# Altium PCB 驱动.pcbdoc (part 1 of 2)
Units mil, origin at the board's own origin, x right, y up, seen from the top; angles counter-clockwise.
Board outline 18731.41 x 3255.76 mil, 2 copper layers (Top Layer, Bottom Layer); 107 components, 212 nets, 609 pads, 80 vias.
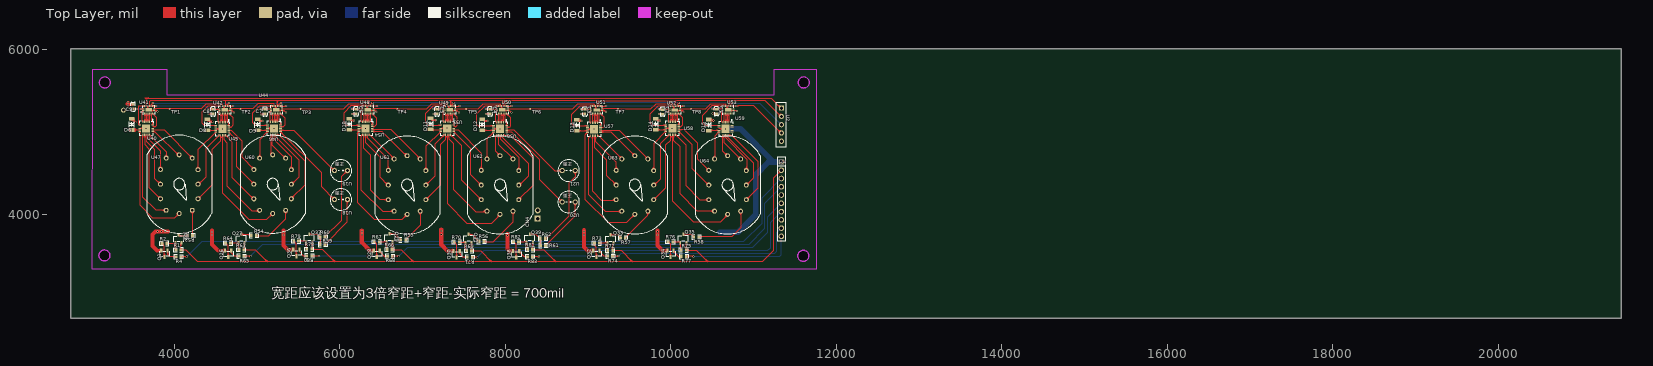
[diagram p0: Top Layer view]
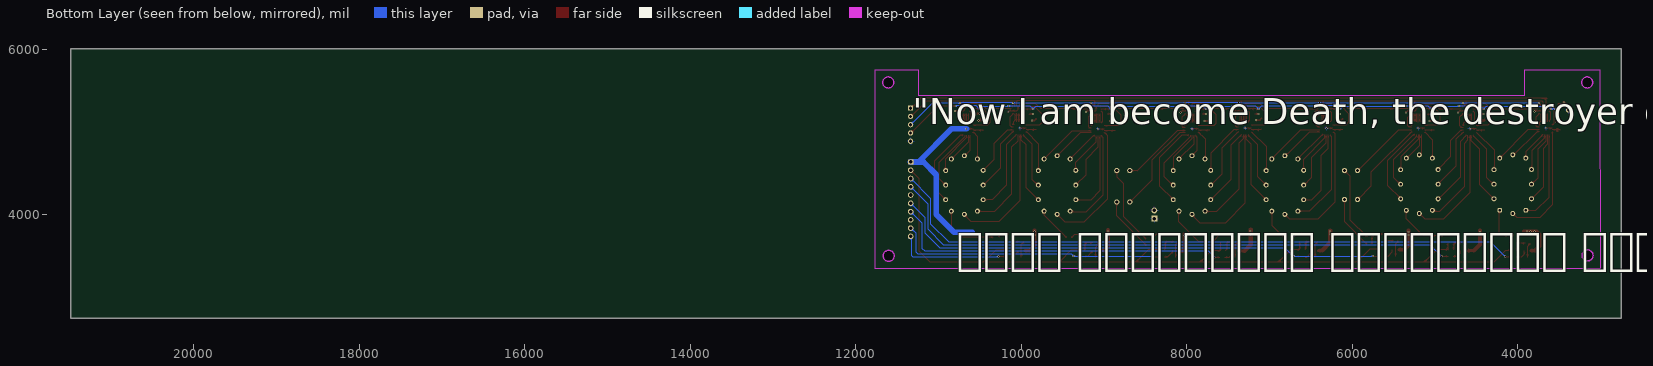
[diagram p1: Bottom Layer view, seen from below]

## Layer stack, top to bottom
Top Layer: signal copper (thickness not stored)
Dielectric: dielectric 12.6, FR-4, Dk 4.8
Bottom Layer: signal copper (thickness not stored)

## Board outline
21481.41,2750 2750,2750 2750,6005.76 21481.41,6005.76
cut-out: 3227.08,5600 cw(c3160.15,5600) 3093.22,5600 cw(c3160.15,5600)
cut-out: 3222.08,3510 cw(c3155.15,3510) 3088.22,3510 cw(c3155.15,3510)
cut-out: 11667.08,3505 cw(c11600.15,3505) 11533.22,3505 cw(c11600.15,3505)
cut-out: 11672.08,5600 cw(c11605.15,5600) 11538.22,5600 cw(c11605.15,5600)

## Design rules (kind name [scope] priority, off if disabled: settings)
BoardOutlineClearance copperThickness1oz [All] p0: genericclearance=10 ignorepadtopadclearanceinfootprint=FALSE except(0: Arc-SplitContinuation Track-SplitContinuation SMDPad-SplitContinuation THPad-SplitContinuation Via-SplitContinuation Fill-SplitContinuation Poly-SplitContinuation Region-SplitContinuation Text-SplitContinuation; 6: SMDPad-CutoutEdge THPad-CutoutEdge Via-CutoutEdge Fill-CutoutEdge Region-CutoutEdge; 11.8: Track-OutlineEdge SMDPad-OutlineEdge THPad-OutlineEdge Via-OutlineEdge Fill-OutlineEdge Region-OutlineEdge Poly-OutlineEdge Text-OutlineEdge Track-CutoutEdge)
BoardOutlineClearance copperThickness2oz [All] p0: genericclearance=10 ignorepadtopadclearanceinfootprint=FALSE except(0: Arc-SplitContinuation Track-SplitContinuation SMDPad-SplitContinuation THPad-SplitContinuation Via-SplitContinuation Fill-SplitContinuation Poly-SplitContinuation Region-SplitContinuation Text-SplitContinuation; 6: SMDPad-CutoutEdge THPad-CutoutEdge Via-CutoutEdge Fill-CutoutEdge Region-CutoutEdge; 11.8: Track-OutlineEdge SMDPad-OutlineEdge THPad-OutlineEdge Via-OutlineEdge Fill-OutlineEdge Region-OutlineEdge Poly-OutlineEdge Text-OutlineEdge Track-CutoutEdge)
Clearance copperThickness1oz [(InNet('SWITCH1') OR InNet('SWITCH2') OR InNet('+5V') OR InNet('SWITCH3') OR InNet('SWITCH6') OR InNet('SWITCH4') OR InNet('A2') OR InNet('A3') OR InNet('A4') OR InNet('A5') OR InNet('A6') OR InNet('A7') OR InNet('GND') OR InNet('CLK') OR InNet('CS') OR InNet('MOSI') OR InNet('ADOT') OR InNet('A1') OR InNet('NIX_A7') OR InNet('NIX_A6') OR InNet('170V') OR InNet('SWITCH5') OR InNet('NIX_D1') OR InNet('D_HV') OR InNet('NIX_G1') OR InNet('F7') OR InNet('F8') OR InNet('F9') OR InNet('F0') OR InNet('F5') OR InNet('F6') OR InNet('E0') OR InNet('FDOT') OR InNet('F1') OR InNet('F2') OR InNet('F3') OR InNet('F4') OR InNet('E8') OR InNet('E9') OR InNet('C2') OR InNet('C3') OR InNet('C4') OR InNet('C5') OR InNet('C6') OR InNet('C7') OR InNet('CDOT') OR InNet('C1') OR InNet('NIX_A0') OR InNet('NIX_B1') OR InNet('NIX_B2') OR InNet('NIX_B3') OR InNet('NIX_B4') OR InNet('NIX_B5') OR InNet('NIX_B7') OR InNet('NIX_B8') OR InNet('NIX_B9') OR InNet('NIX_B0') OR InNet('NIX_ADOT') OR InNet('NIX_A4') OR InNet('NIX_A2') OR InNet('NIX_A3') OR InNet('NIX_A1') OR InNet('NIX_A5') OR InNet('A_HV') OR InNet('NIX_A8') OR InNet('NIX_A9') OR InNet('C_HV') OR InNet('A8') OR InNet('C8') OR InNet('D5') OR InNet('EDOT') OR InNet('NIX_BDOT') OR InNet('NIX_E8') OR InNet('NIX_E0') OR InNet('NIX_E9') OR InNet('NIX_G0') OR InNet('E_HV') OR InNet('NIX_H0') OR InNet('F_HV') OR InNet('NIX_F4') OR InNet('NIX_F2') OR InNet('NIX_F3') OR InNet('NIX_F1') OR InNet('NIX_F5') OR InNet('NIX_FDOT') OR InNet('NIX_F6') OR InNet('NIX_F7') OR InNet('NIX_F0') OR InNet('NIX_F8') OR InNet('NIX_F9') OR InNet('C0') OR InNet('DDOT') OR InNet('D1') OR InNet('D2') OR InNet('D3') OR InNet('D4') OR InNet('C9') OR InNet('D7') OR InNet('D8') OR InNet('D9') OR InNet('D0') OR InNet('H0') OR InNet('H1') OR InNet('D6') OR InNet('E2') OR InNet('E3') OR InNet('E4') OR InNet('E5') OR InNet('E6') OR InNet('E7') OR InNet('E1') OR InNet('NIX_D4') OR InNet('NIX_D2') OR InNet('NIX_D3') OR InNet('NIX_D5') OR InNet('NIX_DDOT') OR InNet('NIX_D6') OR InNet('NIX_D7') OR InNet('NIX_D0') OR InNet('NIX_D8') OR InNet('NIX_D9') OR InNet('NIX_E4') OR InNet('NIX_E2') OR InNet('NIX_E3') OR InNet('NIX_E1') OR InNet('NIX_E5') OR InNet('NIX_EDOT') OR InNet('NIX_E6') OR InNet('NIX_E7') OR InNet('NIX_H1') OR InNet('B_HV') OR InNet('B4') OR InNet('G1') OR InNet('NIX_B6') OR InNet('NIX_CDOT') OR InNet('NIX_C4') OR InNet('NIX_C1') OR InNet('NIX_C3') OR InNet('NIX_C2') OR InNet('NIX_C5') OR InNet('NIX_C6') OR InNet('NIX_C7') OR InNet('NIX_C0') OR InNet('NIX_C8') OR InNet('NIX_C9') OR InNet('B0') OR InNet('B9') OR InNet('B8') OR InNet('B7') OR InNet('B6') OR InNet('B5') OR InNet('G0') OR InNet('B2') OR InNet('B1') OR InNet('BDOT') OR InNet('A0') OR InNet('A9') OR InNet('B3') OR InNet('$1N13403') OR InNet('$1N13394') OR InNet('$1N13396') OR InNet('$1N13978') OR InNet('$1N13404') OR InNet('$1N13405') OR InNet('$1N13979') OR InNet('$1N13980') OR InNet('$1N13981') OR InNet('$1N13982') OR InNet('$1N13983') OR InNet('$1N13668') OR InNet('$1N13669') OR InNet('$1N13670') OR InNet('$1N13767') OR InNet('$1N13768') OR InNet('$1N13769') OR InNet('G_HV1') OR InNet('G_HV2') OR InNet('H_HV1') OR InNet('H_HV2') OR InNet('$1N27498') OR InNet('$1N28072') OR InNet('$1N28104') OR InNet('$1N28136') OR InNet('$1N29050') OR InNet('$1N29111') OR InNet('$1N27497') OR InNet('$1N27501') OR InNet('$1N28168') OR InNet('$1N27677') OR InNet('$1N27676') OR InNet('$1N27680') OR InNet('$1N27856') OR InNet('$1N27855') OR InNet('$1N27859') OR InNet('$1N28035') OR InNet('$1N28034') OR InNet('$1N28038') OR InNet('$1N28943') OR InNet('$1N28942') OR InNet('$1N28946') OR InNet('$1N28989') OR InNet('$1N28951') OR InNet('$1N28950') OR InNet('$1N28954') OR InNet('$1N28974') OR InNet('$1N28959') OR InNet('$1N28958') OR InNet('$1N28962') OR InNet('$1N28967') OR InNet('$1N28966') OR InNet('$1N28970') OR InNet('PGND'))] p1: gap=7 ignorepadtopadclearanceinfootprint=FALSE except(4: Track-Track; 6: Track-SMDPad SMDPad-SMDPad Track-THPad SMDPad-THPad THPad-THPad Track-Via SMDPad-Via THPad-Via Via-Via Track-Fill SMDPad-Fill THPad-Fill Via-Fill Fill-Fill SMDPad-Region THPad-Region Via-Region Fill-Region Region-Region Track-Poly SMDPad-Poly THPad-Poly Via-Poly Fill-Poly Poly-Poly Track-Text SMDPad-Text THPad-Text Via-Text Fill-Text Region-Text Poly-Text Text-Text Track-Hole SMDPad-Hole THPad-Hole Via-Hole Fill-Hole Region-Hole Poly-Hole Text-Hole; 11.8: Track-Region Region-Poly Track-Sheet SMDPad-Sheet THPad-Sheet Via-Sheet Fill-Sheet Region-Sheet Poly-Sheet Text-Sheet Sheet-Hole)
Clearance copperThickness2oz [All] p1: gap=7 ignorepadtopadclearanceinfootprint=FALSE except(6: Track-SMDPad SMDPad-SMDPad Track-THPad SMDPad-THPad THPad-THPad Track-Via SMDPad-Via THPad-Via Via-Via Track-Fill SMDPad-Fill THPad-Fill Via-Fill Fill-Fill SMDPad-Region THPad-Region Via-Region Fill-Region Region-Region Track-Poly SMDPad-Poly THPad-Poly Via-Poly Fill-Poly Poly-Poly Track-Text SMDPad-Text THPad-Text Via-Text Fill-Text Region-Text Poly-Text Text-Text Track-Hole SMDPad-Hole THPad-Hole Via-Hole Fill-Hole Region-Hole Poly-Hole Text-Hole; 8: Track-Track; 11.8: Track-Region Region-Poly Track-Sheet SMDPad-Sheet THPad-Sheet Via-Sheet Fill-Sheet Region-Sheet Poly-Sheet Text-Sheet Sheet-Hole)
DiffPairsRouting differentialPair [All] p1: maxuncoupledlength=10 minlimit=6 maxlimit=6 mostfreqgap=6 toplayer_minwidth=5 toplayer_prefwidth=10 toplayer_maxwidth=100 bottomlayer_minwidth=5 bottomlayer_prefwidth=10 bottomlayer_maxwidth=100
PasteMaskExpansion pasteMaskExpansion [All] p1: expansion=0
PlaneConnect innerPlane [All] p1: planeconnectstyle=Relief reliefexpansion=20 reliefentries=4 reliefconductorwidth=10 reliefairgap=10
PolygonConnect copperRegion [All] p1: connectstyle=Relief reliefentries=4 reliefconductorwidth=10 polygonreliefangle="90 Angle" airgapwidth=10
RoutingVias viaSize [All] p1: viastyle="Through Hole" holewidth=12.0078 minholewidth=11.811 maxholewidth=248.0314 width=24.0158 minwidth=19.685 maxwidth=393.7008
SolderMaskExpansion solderMaskExpansion [All] p1: useseparateexpansions=TRUE expansion=2 expansionbottom=2
Width copperThickness1oz [All] p1: maxlimit=100 minlimit=5 preferedwidth=10
Width copperThickness2oz [All] p1: maxlimit=100 minlimit=8 preferedwidth=10

## Components (designator, comment, footprint, x,y, rotation, side; value= is the part's Value field where it differs from the comment)
C1 "CAP_0603" C0603 10550.22,5250.97 r270 top
C2 "CAP_0603" C0603 9900,5245.2 r270 top
C3 "CAP_0603" C0603 8959.25,5248.31 r270 top
C4 "CAP_0603" C0603 7812.28,5248.63 r270 top
C5 "CAP_0603" C0603 7175,5248.63 r270 top
C6 "CAP_0603" C0603 6195,5249.57 r270 top
C7 "CAP_0603" C0603 5093.22,5247.52 r270 top
C8 "CAP_0603" C0603 4468.27,5248.72 r270 top
C9 "CAP_0603" C0603 3500.75,5307.64 r90 top
CN4 "ZX-XH2.54-2PZZ" CONN-TH_2P-P2.50_HX25003-2A 8390.15,4005 r90 top
D6 "ZMM51" LL-34_L3.5-W1.5-RD 3485,5092.87 r90 top
D8 "ZMM51" LL-34_L3.5-W1.5-RD 4400,5090.63 r90 top
D9 "ZMM51" LL-34_L3.5-W1.5-RD 5005,5090.63 r90 top
D10 "ZMM51" LL-34_L3.5-W1.5-RD 6111.42,5095.63 r90 top
D11 "ZMM51" LL-34_L3.5-W1.5-RD 7095,5100.63 r90 top
D12 "ZMM51" LL-34_L3.5-W1.5-RD 7720,5090.63 r90 top
D13 "ZMM51" LL-34_L3.5-W1.5-RD 8865,5083.76 r90 top
D14 "ZMM51" LL-34_L3.5-W1.5-RD 9815,5095.63 r90 top
D15 "ZMM51" LL-34_L3.5-W1.5-RD 10455,5085.63 r90 top
H4 "MH254V-11-10-1196" HDR-TH_10P-P2.54-V-M 11335.15,4190 r270 top
Q1 "MMBT5551_C2145" SOT-23-3_L2.9-W1.3-P1.90-LS2.4-BR 3880.15,3530 r90 top
Q2 "MMBTA92LT1G" SOT-23-3_L2.9-W1.6-P1.90-LS2.8-BR 4050.15,3710 r270 top
Q26 "MMBT5551_C2145" SOT-23-3_L2.9-W1.3-P1.90-LS2.4-BR 4650.15,3530 r90 top
Q27 "MMBTA92LT1G" SOT-23-3_L2.9-W1.6-P1.90-LS2.8-BR 4810.15,3715 r270 top
Q28 "MMBT5551_C2145" SOT-23-3_L2.9-W1.3-P1.90-LS2.4-BR 6445.15,3530 r90 top
Q29 "MMBTA92LT1G" SOT-23-3_L2.9-W1.6-P1.90-LS2.8-BR 6600.15,3725 r270 top
Q30 "MMBT5551_C2145" SOT-23-3_L2.9-W1.3-P1.90-LS2.4-BR 7410.15,3525 r90 top
Q31 "MMBTA92LT1G" SOT-23-3_L2.9-W1.6-P1.90-LS2.8-BR 7555.15,3715 r270 top
Q32 "MMBT5551_C2145" SOT-23-3_L2.9-W1.3-P1.90-LS2.4-BR 9100.15,3530 r90 top
Q33 "MMBTA92LT1G" SOT-23-3_L2.9-W1.6-P1.90-LS2.8-BR 9270.15,3710 r270 top
Q34 "MMBT5551_C2145" SOT-23-3_L2.9-W1.3-P1.90-LS2.4-BR 9995.15,3530 r90 top
Q35 "MMBTA92LT1G" SOT-23-3_L2.9-W1.6-P1.90-LS2.8-BR 10150.15,3715 r270 top
Q36 "MMBT5551_C2145" SOT-23-3_L2.9-W1.3-P1.90-LS2.4-BR 5475.15,3540 r90 top
Q37 "MMBTA92LT1G" SOT-23-3_L2.9-W1.6-P1.90-LS2.8-BR 5630.15,3720 r270 top
Q38 "MMBT5551_C2145" SOT-23-3_L2.9-W1.3-P1.90-LS2.4-BR 8130.15,3525 r90 top
Q39 "MMBTA92LT1G" SOT-23-3_L2.9-W1.6-P1.90-LS2.8-BR 8295.15,3720 r270 top
R1 "Res_0603" R0603 4050.15,3575 r0 top
R2 "Res_0603" R0603 3880.15,3655 r0 top
R4 "Res_0603" R0603 4049.62,3495.4 r180 top
R53 "Res_0603" R0603 4190.15,3750 r180 top
R54 "Res_0603" R0603 4960.15,3750 r180 top
R55 "Res_0603" R0603 6765.75,3698.19 r180 top
R56 "Res_0603" R0603 7710.75,3678.19 r180 top
R57 "Res_0603" R0603 9420.75,3723.19 r180 top
R58 "Res_0603" R0603 10305.75,3733.19 r180 top
R59 "Res_0603" R0603 5790.75,3643.19 r180 top
R60 "Res_0603" R0603 5790.15,3735 r180 top
R61 "Res_0603" R0603 8455.15,3630 r180 top
R62 "Res_0603" R0603 8453.12,3713.19 r180 top
R63 "Res_0603" R0603 4810.15,3580 r0 top
R64 "Res_0603" R0603 4648.37,3660.89 r0 top
R65 "Res_0603" R0603 4810.15,3500 r180 top
R66 "Res_0603" R0603 6600.75,3580.89 r0 top
R67 "Res_0603" R0603 6445.75,3675.89 r0 top
R68 "Res_0603" R0603 6604.55,3498.19 r180 top
R69 "Res_0603" R0603 7560.75,3565.89 r0 top
R70 "Res_0603" R0603 7410.75,3670.89 r0 top
R71 "Res_0603" R0603 7569.55,3488.19 r180 top
R72 "Res_0603" R0603 9265.75,3570.89 r0 top
R73 "Res_0603" R0603 9105.75,3660.89 r0 top
R74 "Res_0603" R0603 9265.15,3500 r180 top
R75 "Res_0603" R0603 10155.75,3575.89 r0 top
R76 "Res_0603" R0603 9995.15,3675 r0 top
R77 "Res_0603" R0603 10154.55,3498.19 r180 top
R78 "Res_0603" R0603 5630.75,3585.89 r0 top
R79 "Res_0603" R0603 5470.75,3685.89 r0 top
R80 "Res_0603" R0603 5629.55,3503.19 r180 top
R81 "Res_0603" R0603 8298.37,3580.89 r0 top
R82 "Res_0603" R0603 8128.37,3675.89 r0 top
R83 "Res_0603" R0603 8297.18,3493.19 r180 top
TP1 "Test-Point" Test-Point-0.5mm 3945.15,5280 r0 top
TP2 "Test-Point" Test-Point-0.5mm 4800.15,5280 r0 top
TP3 "Test-Point" Test-Point-0.5mm 5525.15,5280 r0 top
TP4 "Test-Point" Test-Point-0.5mm 6695.15,5280 r0 top
TP5 "Test-Point" Test-Point-0.5mm 7525.15,5280 r0 top
TP6 "Test-Point" Test-Point-0.5mm 8300.15,5280 r0 top
TP7 "Test-Point" Test-Point-0.5mm 9360.15,5280 r0 top
TP8 "Test-Point" Test-Point-0.5mm 10245.15,5280 r0 top
U2 "2.54mm1*5" 2.54mm1*5 11335.15,5090 r270 top
U18 "氖泡" 6*13氖泡 6012.99,4185.63 r180 top
U19 "氖泡" 6*13氖泡 6012.99,4535.63 r180 top
U20 "氖泡" 6*13氖泡 8765,4155.63 r180 top
U21 "氖泡" 6*13氖泡 8765,4535.63 r180 top
U40 "ULN2803A_C493377" QFN-20_L4.0-W4.0-P0.50-BL-EP 3659.33,5045.63 r180 top
U41 "74HC595BQ,115" DHVQFN-16_L3.5-W2.5-P0.50-BL-EP 3688.86,5269.69 r0 top
U42 "74HC595BQ,115" DHVQFN-16_L3.5-W2.5-P0.50-BL-EP 4610,5269.69 r0 top
U44 "74HC595BQ,115" DHVQFN-16_L3.5-W2.5-P0.50-BL-EP 5233.81,5270.24 r0 top
U45 "ULN2803A_C493377" QFN-20_L4.0-W4.0-P0.50-BL-EP 4580.47,5040.36 r180 top
U46 "ULN2803A_C493377" QFN-20_L4.0-W4.0-P0.50-BL-EP 5203.62,5044.69 r180 top
U47 "IN12" IN12 4058.8,4371.27 r0 top
U48 "74HC595BQ,115" DHVQFN-16_L3.5-W2.5-P0.50-BL-EP 6339.68,5270.63 r0 top
U49 "74HC595BQ,115" DHVQFN-16_L3.5-W2.5-P0.50-BL-EP 7327.11,5269.97 r0 top
U50 "74HC595BQ,115" DHVQFN-16_L3.5-W2.5-P0.50-BL-EP 7964.25,5269.3 r0 top
U51 "74HC595BQ,115" DHVQFN-16_L3.5-W2.5-P0.50-BL-EP 9101.1,5268.98 r0 top
U52 "74HC595BQ,115" DHVQFN-16_L3.5-W2.5-P0.50-BL-EP 10045,5268.98 r0 top
U53 "74HC595BQ,115" DHVQFN-16_L3.5-W2.5-P0.50-BL-EP 10690,5270.79 r0 top
U54 "ULN2803A_C493377" QFN-20_L4.0-W4.0-P0.50-BL-EP 6310.15,5046.06 r180 top
U55 "ULN2803A_C493377" QFN-20_L4.0-W4.0-P0.50-BL-EP 7297.58,5045.63 r180 top
U56 "ULN2803A_C493377" QFN-20_L4.0-W4.0-P0.50-BL-EP 7935.32,5040.63 r180 top
U57 "ULN2803A_C493377" QFN-20_L4.0-W4.0-P0.50-BL-EP 9070.91,5035.63 r180 top
U58 "ULN2803A_C493377" QFN-20_L4.0-W4.0-P0.50-BL-EP 10017.32,5047.42 r180 top
U59 "ULN2803A_C493377" QFN-20_L4.0-W4.0-P0.50-BL-EP 10659.81,5041.13 r180 top
U60 "IN12" IN12 5188,4370.63 r0 top
U61 "IN12" IN12 6812.88,4360.63 r0 top
U62 "IN12" IN12 7935,4360.63 r0 top
U63 "IN12" IN12 9565,4360.63 r0 top
U64 "IN12" IN12 10685,4360.63 r0 top

## Footprints (in the part's own frame and the unit in brackets; to place one, negate y for a bottom-side part, rotate by r counter-clockwise, add the part's x,y. Pads: shape width x height; smd on the part's side, far side on the other; paste and mask are expansions set on the pad)
2.54mm1*5 [mm]
  rect 1.6x1.6 hole 1: 1(-5.08,0)
  round 1.6 hole 1: 2(-2.54,0) 3(0,0) 4(2.54,0) 5(5.08,0)
  silkscreen extent -6.86,-1.52 6.86,1.4
6*13氖泡 [mm]
  round 1.6 hole 1: 1(-2,0) 2(2,0)
  silkscreen extent -3.3,-3.3 3.3,3.3
C0603 [mm]
  rect 0.8x0.9 smd: 1(-0.7,0) 2(0.7,0)
  silkscreen extent -1.41,-0.71 1.39,0.72
CONN-TH_2P-P2.50_HX25003-2A [mm]
  rect 1.8x1.8 hole 1.1: 1(-1.25,0)
  round 1.8 hole 1.1: 2(1.25,0)
DHVQFN-16_L3.5-W2.5-P0.50-BL-EP [mm]
  rect 0.665x0.28 smd: 1(-1.658,-0.25) 8(1.658,-0.25) 9(1.658,0.25) 16(-1.658,0.25)
  rect 0.28x0.665 smd: 2(-1.25,-1.157) 3(-0.75,-1.157) 4(-0.25,-1.157) 5(0.25,-1.157) 6(0.75,-1.157) 7(1.25,-1.157) 10(1.25,1.157) 11(0.75,1.157) 12(0.25,1.157) 13(-0.25,1.157) 14(-0.75,1.157) 15(-1.25,1.157)
  rect 2x1 smd: 17(0,0)
  silkscreen extent -2.36,-1.33 1.83,1.33
HDR-TH_10P-P2.54-V-M [mm]
  rect 1.575x1.7 hole 1.1: 1(-11.43,0)
  round 1.7 hole 1.1: 2(-8.89,0) 3(-6.35,0) 4(-3.81,0) 5(-1.27,0) 6(1.27,0) 7(3.81,0) 8(6.35,0) 9(8.89,0) 10(11.43,0)
  silkscreen extent -12.9,-1.27 12.95,1.27
IN12 [mil]
  round 60 hole 31.5: 0(226.4,-177.2) 1(-157.5,-315) 2(-226.4,-177.2) 3(-226.4,0) 4(-226.4,177.2) 5(-157.5,315) 6(0,354.3) 7(157.5,315) 8(226.4,175) 9(226.4,0) DOT(0,-354.3) HV(157.5,-315)
  silkscreen extent -394,-591 394,591
LL-34_L3.5-W1.5-RD [mm]
  rect 1.1x1.7 smd: 1(-1.7,0) 2(1.7,0)
  silkscreen extent -0.9,-0.8 0.9,0.8
QFN-20_L4.0-W4.0-P0.50-BL-EP [mm]
  rect 0.28x0.8 smd: 1(-1,-2) 2(-0.5,-2) 3(0,-2) 4(0.5,-2) 5(1,-2) 11(1,2) 12(0.5,2) 13(0,2) 14(-0.5,2) 15(-1,2)
  rect 0.8x0.28 smd: 6(2,-1) 7(2,-0.5) 8(2,0) 9(2,0.5) 10(2,1) 16(-2,1) 17(-2,0.5) 18(-2,0) 19(-2,-0.5) 20(-2,-1)
  rect 2.5x2.5 smd: 21(0,0)
  silkscreen extent -2.15,-2.82 2.15,2.15
R0603 [mil]
  rect 31.75x34.02 smd: 1(-29.66,0) 2(29.66,0)
  silkscreen extent -55,-26 55,26
SOT-23-3_L2.9-W1.3-P1.90-LS2.4-BR [mm]
  rect 1.25x0.7 smd: 1(1,-0.95) 2(1,0.95) 3(-1,0)
  silkscreen extent -0.73,-1.53 0.73,1.53
SOT-23-3_L2.9-W1.6-P1.90-LS2.8-BR [mm]
  rect 1.07x0.6 smd: 1(1.235,-0.95) 2(1.235,0.95) 3(-1.235,0)
  silkscreen extent -0.88,-1.54 0.88,1.54
Test-Point-0.5mm [mm]
  round 0.5 smd: 1(0,0)

## Free pads (board coordinates)
  round 60 hole 36: 1(3385.15,5265)
  round 19.68 hole 12.01: 22(3659.33,5045) 22(4580.47,5040) 22(5203.62,5045) 22(6310.15,5045) 22(7293.26,5050) 22(7934.72,5040) 22(9071.57,5040) 22(10015.47,5045) 22(10660.47,5040)

## Via types
v1: diameter 24.02, hole 12.01, Top Layer to Bottom Layer, 80 vias

## Nets (pads, with @x,y where several pads share a name; then routed paths per layer and width w, separated by ;. In a path a pad name is that pad's centre, name@x,y a point inside that pad or via, vN(x,y) a via of type N, cw(c..) or ccw(c..) an arc to the next point about the centre after c; other vN are vias at no path point)
170V: H4.2 Q2.2 Q27.2 Q29.2 Q31.2 Q33.2 Q35.2 Q37.2 Q39.2 R1.2 R63.2 R66.2 R69.2 R72.2 R75.2 R78.2 R81.2 | length 11278.7
  Top Layer w10: Q2.2@4087.55,3661.38 4079.81,3653.64 R1.2@4079.81,3575 4145.15,3575 4284.52,3435.63 5124.52,3435.63 4980.15,3580 R63.2@4839.81,3580 4847.55,3587.74 Q27.2@4847.55,3666.38 ; 5124.54,3435.63 5940.15,3435.63 ; Q37.2@5667.55,3671.38 5667.55,3593.03 R78.2@5660.41,3585.89 5789.89,3585.89 5940.15,3435.63 ; Q29.2@6637.55,3676.38 6630.41,3669.23 R66.2@6630.41,3580.89 6741.22,3580.89 6886.48,3435.63 ; Q31.2@7592.55,3666.38 7590.41,3664.23 R69.2@7590.41,3565.89 7701.3,3565.89 7831.55,3435.63 ; Q39.2@8332.55,3671.38 8328.03,3666.86 R81.2@8328.03,3580.89 8462.43,3580.89 8607.69,3435.63 ; Q33.2@9307.55,3661.38 9295.41,3649.23 R72.2@9295.41,3570.89 9397.71,3570.89 9532.96,3435.63 ; Q35.2@10187.55,3666.38 10185.41,3664.23 R75.2@10185.41,3575.89 10304.83,3575.89 10445.09,3435.63 ; H4.2@11335.15,4540 11235.15,4440 11235.15,3565 11105.78,3435.63 10445.09,3435.63 ; 5940.15,3435.63 6886.48,3435.63 ; 6886.48,3435.63 7831.55,3435.63 ; 7831.55,3435.63 8607.69,3435.63 ; 8607.69,3435.63 9532.96,3435.63 ; 9532.96,3435.63 10445.09,3435.63
$1N13394: TP1.1 U41.9 U42.14 | length 874.2
  Top Layer w8: U41.9@3759.59,5280 TP1.1@3945.15,5280 4324.37,5280 4385,5340.63 4576.77,5340.63 4580.47,5336.93 U42.14@4580.47,5310.26
$1N13396: TP2.1 U42.9 U44.14 | length 575.4
  Top Layer w8: U42.9@4680.73,5280 TP2.1@4800.15,5280 4944.37,5280 5005,5340.63 5199.04,5340.63 5204.28,5335.38 U44.14@5204.28,5310.81
$1N13403: D6.1 U40.9 | length 98.8
  Top Layer w10: D6.1@3485,5023.7 D6.1@3487.24,5025.94 ; D6.1@3485,5025.94 D6.1@3487.24,5025.94 ; U40.9@3580.59,5025.94 D6.1@3487.24,5025.94
$1N13404: D8.1 U45.9 | length 103
  Top Layer w10: D8.1@4400,5023.7 4403.04,5020.67 U45.9@4501.73,5020.67
$1N13405: D9.1 U46.9 | length 120.4
  Top Layer w10: D9.1@5005,5023.7 5006.3,5025 U46.9@5124.88,5025
$1N13668: D10.1 U54.9 | length 121
  Top Layer w10: D10.1@6111.42,5028.7 6113.76,5026.37 U54.9@6231.41,5026.37
$1N13669: D11.1 U55.9 | length 127.1
  Top Layer w10: D11.1@7095,5033.7 7102.76,5025.94 U55.9@7218.84,5025.94
$1N13670: D12.1 U56.9 | length 137.7
  Top Layer w10: D12.1@7720,5023.7 7722.76,5020.94 U56.9@7856.58,5020.94
$1N13767: D13.1 U57.9 | length 127.5
  Top Layer w10: D13.1@8865,5016.83 8991.28,5016.83 U57.9@8992.17,5015.94
$1N13768: D14.1 U58.9 | length 124
  Top Layer w10: D14.1@9815,5028.7 9937.61,5028.7 U58.9@9938.58,5027.73
$1N13769: D15.1 U59.9 | length 127.2
  Top Layer w10: D15.1@10455,5018.7 10457.74,5021.44 U59.9@10581.07,5021.44
$1N13978: TP3.1 U44.9 U48.14 | length 1057.7
  Top Layer w8: U44.9@5304,5280 TP3.1@5525.15,5280 6049.37,5280 6110,5340.63 6305,5340.63 6310,5335.63 6310,5311.36 U48.14@6310.15,5311.2
$1N13979: TP4.1 U48.9 U49.14 | length 940.5
  Top Layer w8: U48.9@6409.47,5280 TP4.1@6695.15,5280 7049.37,5280 7110,5340.63 7292.68,5340.63 7297.58,5335.74 U49.14@7297.58,5310.54
$1N13980: TP5.1 U49.9 U50.14 | length 590.7
  Top Layer w8: U49.9@7397.56,5280 TP5.1@7525.15,5280 7674.37,5280 7735,5340.63 7930.35,5340.63 7935,5335.99 7935,5310.15 U50.14@7934.72,5309.87
$1N13981: TP6.1 U50.9 U51.14 | length 1089.9
  Top Layer w8: U50.9@8035.37,5280 TP6.1@8300.15,5280 8814.37,5280 8875,5340.63 9067.35,5340.63 9071.57,5336.41 U51.14@9071.57,5309.55
$1N13982: TP7.1 U51.9 U52.14 | length 895.9
  Top Layer w8: U51.9@9172.54,5280 TP7.1@9360.15,5280 9759.37,5280 9820,5340.63 10010,5340.63 10015.47,5335.16 U52.14@10015.47,5309.55
$1N13983: TP8.1 U52.9 U53.14 | length 594.6
  Top Layer w8: U52.9@10116.44,5280 TP8.1@10245.15,5280 10419.37,5280 10480,5340.63 10653.89,5340.63 10660.47,5334.05 U53.14@10660.47,5311.36
$1N27497: Q1.3 R2.1 | length 176.7
  Top Layer w10: R2.1@3850.49,3655 3850.49,3653.87 3880.15,3624.21 Q1.3@3880.15,3490.63
$1N27498: Q1.1 R4.2 | length 157.5
  Top Layer w10: Q1.1@3917.55,3569.37 3920.15,3566.77 3920.15,3525 3949.74,3495.4 R4.2@4019.96,3495.4
$1N27501: Q2.1 R1.1 R2.2 | length 195.2
  Top Layer w10: R2.2@3909.81,3655 4006.37,3655 Q2.1@4012.75,3661.38 4012.75,3582.74 R1.1@4020.49,3575
$1N27676: Q26.3 R64.1 | length 183.3
  Top Layer w10: R64.1@4618.71,3660.89 4618.71,3659.76 4650.15,3628.32 Q26.3@4650.15,3490.63
$1N27677: Q26.1 R65.2 | length 137.4
  Top Layer w10: Q26.1@4687.55,3569.37 4687.55,3542.6 4730.15,3500 R65.2@4780.49,3500
$1N27680: Q27.1 R63.1 R64.2 | length 186.6
  Top Layer w10: R64.2@4678.03,3660.89 4767.26,3660.89 Q27.1@4772.75,3666.38 4772.75,3587.74 R63.1@4780.49,3580
$1N27855: Q28.3 R67.1 | length 197.3
  Top Layer w10: R67.1@6416.09,3675.89 6416.09,3674.76 6445.15,3645.69 Q28.3@6445.15,3490.63
$1N27856: Q28.1 R68.2 | length 135
  Top Layer w10: Q28.1@6482.55,3569.37 6482.55,3558.54 6551.09,3490 6566.7,3490 R68.2@6574.89,3498.19
$1N27859: Q29.1 R66.1 R67.2 | length 186.5
  Top Layer w10: R67.2@6475.41,3675.89 6562.26,3675.89 Q29.1@6562.75,3676.38 6562.75,3589.23 R66.1@6571.09,3580.89
$1N28034: Q30.3 R70.1 | length 197.3
  Top Layer w10: R70.1@7381.09,3670.89 7381.09,3669.76 7410.15,3640.69 Q30.3@7410.15,3485.63
$1N28035: Q30.1 R71.2 | length 145.4
  Top Layer w10: Q30.1@7447.55,3564.37 7447.55,3527.6 7486.96,3488.19 R71.2@7539.89,3488.19
$1N28038: Q31.1 R69.1 R70.2 | length 185.2
  Top Layer w10: R70.2@7440.41,3670.89 7513.23,3670.89 Q31.1@7517.75,3666.38 7517.75,3579.23 R69.1@7531.09,3565.89
$1N28072: Q27.3 R54.2 | length 126
  Top Layer w10: Q27.3@4810.15,3763.62 4890.99,3763.62 4904.61,3750 R54.2@4930.49,3750
$1N28104: Q29.3 R55.2 | length 167.8
  Top Layer w10: Q29.3@6600.15,3773.62 6661.78,3773.62 6736.09,3699.32 R55.2@6736.09,3698.19
$1N28136: Q31.3 R56.2 | length 162
  Top Layer w10: Q31.3@7555.15,3763.62 7596.78,3763.62 7681.09,3679.32 R56.2@7681.09,3678.19
$1N28168: Q2.3 R53.2 | length 113.9
  Top Layer w10: Q2.3@4050.15,3758.62 4058.77,3750 R53.2@4160.49,3750
$1N28942: Q32.3 R73.1 | length 180.2
  Top Layer w10: R73.1@9076.09,3660.89 9076.09,3633.88 9100.15,3609.82 Q32.3@9100.15,3490.63
$1N28943: Q32.1 R74.2 | length 133
  Top Layer w10: Q32.1@9137.55,3569.37 9137.55,3558.54 9196.09,3500 R74.2@9235.49,3500
$1N28946: Q33.1 R72.1 R73.2 | length 189.4
  Top Layer w10: R73.2@9135.41,3660.89 9232.26,3660.89 Q33.1@9232.75,3661.38 9232.75,3574.23 R72.1@9236.09,3570.89
$1N28950: Q34.3 R76.1 | length 196.7
  Top Layer w10: R76.1@9965.49,3675 9965.49,3673.87 9995.15,3644.21 Q34.3@9995.15,3490.63
$1N28951: Q34.1 R77.2 | length 135
  Top Layer w10: Q34.1@10032.55,3569.37 10032.55,3558.54 10101.09,3490 10116.7,3490 R77.2@10124.89,3498.19
$1N28954: Q35.1 R75.1 R76.2 | length 187.5
  Top Layer w10: R76.2@10024.81,3675 10104.12,3675 Q35.1@10112.75,3666.38 10112.75,3589.23 R75.1@10126.09,3575.89
$1N28958: Q36.3 R79.1 | length 199.4
  Top Layer w10: R79.1@5441.09,3685.89 5441.09,3684.76 5475.15,3650.69 Q36.3@5475.15,3500.63
$1N28959: Q36.1 R80.2 | length 137.2
  Top Layer w10: Q36.1@5512.55,3579.37 5512.55,3552.6 5565.15,3500 5596.7,3500 R80.2@5599.89,3503.19
$1N28962: Q37.1 R78.1 R79.2 | length 187.3
  Top Layer w10: R79.2@5500.41,3685.89 5578.23,3685.89 Q37.1@5592.75,3671.38 5592.75,3594.23 R78.1@5601.09,3585.89
$1N28966: Q38.3 R82.1 | length 203.3
  Top Layer w10: R82.1@8098.71,3675.89 8098.71,3674.76 8130.15,3643.32 Q38.3@8130.15,3485.63
$1N28967: Q38.1 R83.2 | length 135.8
  Top Layer w10: Q38.1@8167.55,3564.37 8167.55,3553.54 8227.9,3493.19 R83.2@8267.52,3493.19
$1N28970: Q39.1 R81.1 R82.2 | length 196.6
  Top Layer w10: R82.2@8158.03,3675.89 8253.23,3675.89 Q39.1@8257.75,3671.38 8257.75,3591.85 R81.1@8268.71,3580.89
$1N28974: Q35.3 R58.2 | length 139.2
  Top Layer w10: Q35.3@10150.15,3763.62 10246.78,3763.62 10276.09,3734.32 R58.2@10276.09,3733.19
$1N28989: Q33.3 R57.2 | length 136.3
  Top Layer w10: Q33.3@9270.15,3758.62 9356.78,3758.62 9391.09,3724.32 R57.2@9391.09,3723.19
$1N29050: Q37.3 R59.2 R60.2 | length 237
  Top Layer w10: Q37.3@5630.15,3768.62 5728,3768.62 5760.49,3736.13 R60.2@5760.49,3735 5760.49,3643.79 R59.2@5761.09,3643.19
$1N29111: Q39.3 R61.2 R62.2 | length 236
  Top Layer w10: Q39.3@8295.15,3768.62 8369.16,3768.62 8423.46,3714.32 R62.2@8423.46,3713.19 8423.46,3632.03 R61.2@8425.49,3630
+5V: C1.1 C2.1 C3.1 C4.1 C5.1 C6.1 C7.1 C8.1 C9.1 U2.4 U41.10 U41.16 U42.10 U42.16 U44.10 U44.16 U48.10 U48.16 U49.10 U49.16 U50.10 U50.16 U51.10 U51.16 U52.10 U52.16 U53.10 U53.16 | length 9782.5
  Top Layer w10: C9.1@3500.75,5280.08 3540.07,5280.08 v1(3540.15,5280) ; v1(3595,5280.63) 3622.49,5280.63 U41.16@3623.6,5279.53 ; U41.10@3738.07,5315.26 3779.62,5315.26 v1(3780,5315.63) ; v1(4415.15,5280) 4415.62,5279.53 U42.16@4544.74,5279.53 ; U42.10@4659.21,5315.26 v1(4707.54,5315.26) ; v1(5045.15,5280) 5045.23,5280.08 U44.16@5168.56,5280.08 ; U44.10@5283.02,5315.81 v1(5350,5315.81) ; v1(6145.15,5280) 6145.62,5280.47 U48.16@6274.42,5280.47 ; U48.10@6388.89,5316.2 v1(6450,5316.2) ; v1(7130.15,5280) 7130.34,5279.81 U49.16@7261.85,5279.81 ; U49.10@7376.32,5315.54 v1(7445,5315.54) ; v1(7765.15,5280) 7766.01,5279.14 U50.16@7898.99,5279.14 ; U50.10@8013.46,5314.87 v1(8075,5314.87) ; v1(8915.15,5280) 8916.33,5278.82 U51.16@9035.84,5278.82 ; U51.10@9150.31,5314.55 v1(9215,5314.55) ; v1(9855.15,5280) 9856.33,5278.82 U52.16@9979.74,5278.82 ; U52.10@10094.21,5314.55 v1(10150,5314.55) ; v1(10505.15,5280) 10505.78,5280.63 U53.16@10624.74,5280.63 ; U53.10@10739.21,5316.36 v1(10795,5316.36)
  Top Layer w15: v1(10795,5316.36) 11003.79,5316.36 U2.4@11330.15,4990
  Bottom Layer w15: v1(3540.15,5280) 3540.78,5280.63 v1(3595,5280.63) 3630,5315.63 v1(3780,5315.63) 4379.52,5315.63 v1(4415.15,5280) 4450.41,5315.26 v1(4707.54,5315.26) 5009.89,5315.26 v1(5045.15,5280) 5080.96,5315.81 v1(5350,5315.81) 6109.34,5315.81 v1(6145.15,5280) 6181.35,5316.2 v1(6450,5316.2) 7093.95,5316.2 v1(7130.15,5280) 7165.69,5315.54 v1(7445,5315.54) 7729.61,5315.54 v1(7765.15,5280) 7800.02,5314.87 v1(8075,5314.87) 8880.28,5314.87 v1(8915.15,5280) 8949.7,5314.55 v1(9215,5314.55) 9820.6,5314.55 v1(9855.15,5280) 9889.7,5314.55 v1(10150,5314.55) 10470.6,5314.55 v1(10505.15,5280) 10541.51,5316.36 v1(10795,5316.36)
A0: U42.2 U45.4 | length 105
  Top Layer w10: U45.4@4560.78,5119.1 U42.2@4560.79,5224.12
A1: U40.5 U41.1 | length 149.4
  Top Layer w10: U40.5@3619.96,5124.37 3619.96,5135.68 3605,5150.63 3605,5241.25 U41.1@3623.6,5259.85
A2: U40.4 U41.2 | length 99.7
  Top Layer w10: U40.4@3639.64,5124.37 U41.2@3639.65,5224.12
A3: U40.3 U41.3 | length 99.7
  Top Layer w10: U40.3@3659.33,5124.37 U41.3@3659.33,5224.12
A4: U40.2 U41.4 | length 99.7
  Top Layer w10: U40.2@3679.01,5124.37 U41.4@3679.02,5224.12
A5: U40.1 U41.5 | length 99.7
  Top Layer w10: U40.1@3698.7,5124.37 U41.5@3698.7,5224.12
A6: U40.20 U41.6 | length 148.9
  Top Layer w10: U41.6@3718.39,5224.12 3718.39,5132.25 3740,5110.63 3740,5086.94 U40.20@3738.07,5085
A7: U40.19 U41.7 | length 212.1
  Top Layer w10: U40.19@3738.07,5065.31 3769.68,5065.31 3780,5075.63 3780,5182.18 U41.7@3738.07,5224.12
A8: U42.15 U45.6 | length 576.2
  Top Layer w10: U45.6@4501.73,5079.73 4500.82,5080.63 4360,5080.63 4330,5110.63 4330,5240.63 4404.62,5315.26 U42.15@4560.79,5315.26
A9: U42.1 U45.5 | length 158.3
  Top Layer w10: U45.5@4541.1,5119.1 4536.54,5119.1 4525,5130.63 4525,5240.11 U42.1@4544.74,5259.85
A_HV: R53.1 U47.HV | length 307.7
  Top Layer w10: U47.HV@4216.3,4056.27 4219.81,4052.76 R53.1@4219.81,3750
ADOT: U40.6 U41.15 | length 308.7
  Top Layer w10: U40.6@3580.59,5085 3565,5100.59 3565,5310.77 3569.49,5315.26 U41.15@3639.65,5315.26
B0: U44.5 U46.1 | length 101.5
  Top Layer w10: U46.1@5242.99,5123.43 5243.65,5124.09 U44.5@5243.65,5224.67
B1: U42.4 U45.2 | length 105
  Top Layer w10: U45.2@4600.15,5119.1 U42.4@4600.16,5224.12
B2: U42.5 U45.1 | length 105
  Top Layer w10: U45.1@4619.84,5119.1 U42.5@4619.84,5224.12
B3: U42.6 U45.20 | length 152.5
  Top Layer w10: U42.6@4639.53,5224.12 4639.53,5121.1 4655,5105.63 4655,5083.94 U45.20@4659.21,5079.73
B4: U42.7 U45.19 | length 216.8
  Top Layer w10: U45.19@4659.21,5060.04 4659.81,5060.63 4685,5060.63 4705,5080.63 4705,5178.33 U42.7@4659.21,5224.12
B5: U44.15 U46.6 | length 589.9
  Top Layer w10: U46.6@5124.88,5084.06 4976.57,5084.06 4940,5120.63 4940,5230.63 5025.17,5315.81 U44.15@5184.6,5315.81
B6: U44.1 U46.5 | length 153
  Top Layer w10: U46.5@5164.25,5123.43 5160,5123.43 5150,5133.43 5150,5241.84 U44.1@5168.56,5260.4
B7: U44.2 U46.4 | length 101.5
  Top Layer w10: U46.4@5183.93,5123.43 5184.6,5124.1 U44.2@5184.6,5224.67
B8: U44.3 U46.3 | length 101.5
  Top Layer w10: U46.3@5203.62,5123.43 5204.28,5124.09 U44.3@5204.28,5224.67
B9: U44.4 U46.2 | length 101.5
  Top Layer w10: U46.2@5223.3,5123.43 5223.98,5124.1 U44.4@5223.98,5224.67
B_HV: R54.1 U60.HV | length 541
  Top Layer w10: R54.1@4989.81,3750 5140.15,3750 5345.5,3955.35 U60.HV@5345.5,4055.63
BDOT: U42.3 U45.3 | length 105
  Top Layer w10: U45.3@4580.47,5119.1 U42.3@4580.47,5224.12
C0: U49.2 U55.4 | length 100
  Top Layer w10: U55.4@7277.89,5124.37 U49.2@7277.9,5224.4
C1: U48.1 U54.5 | length 154
  Top Layer w10: U54.5@6270.78,5124.8 6265,5124.8 6255,5134.8 6255,5241.37 U48.1@6274.42,5260.79
C2: U48.2 U54.4 | length 100.3
  Top Layer w10: U54.4@6290.46,5124.8 U48.2@6290.47,5225.06
C3: U48.3 U54.3 | length 100.3
  Top Layer w10: U54.3@6310.15,5124.8 U48.3@6310.15,5225.06
C4: U48.4 U54.2 | length 100.3
  Top Layer w10: U54.2@6329.83,5124.8 U48.4@6329.84,5225.06
C5: U48.5 U54.1 | length 100.3
  Top Layer w10: U54.1@6349.52,5124.8 U48.5@6349.52,5225.06
C6: U48.6 U54.20 | length 148.7
  Top Layer w10: U48.6@6369.21,5225.06 6369.21,5136.42 6390,5115.63 6390,5086.53 U54.20@6388.89,5085.43
C7: U48.7 U54.19 | length 217.1
  Top Layer w10: U54.19@6388.89,5065.74 6388.99,5065.63 6415,5065.63 6440,5090.63 6440,5173.96 U48.7@6388.89,5225.06
C8: U49.15 U55.6 | length 590.8
  Top Layer w10: U55.6@7218.84,5085 7218.21,5085.63 7065,5085.63 7030,5120.63 7030,5220.63 7124.9,5315.54 U49.15@7277.9,5315.54
C9: U49.1 U55.5 | length 148.2
  Top Layer w10: U55.5@7258.21,5124.37 7245,5137.59 7245,5243.28 U49.1@7261.85,5260.13
C_HV: R55.1 U61.HV | length 419.9
  Top Layer w10: R55.1@6795.41,3698.19 6795.41,3699.32 6970.38,3874.29 U61.HV@6970.38,4045.63
CDOT: U48.15 U54.6 | length 591.9
  Top Layer w10: U54.6@6231.41,5085.43 6231.2,5085.63 6080,5085.63 6045,5120.63 6045,5230.63 6130.57,5316.2 U48.15@6290.47,5316.2
CLK: U2.3 U41.11 U42.11 U44.11 U48.11 U49.11 U50.11 U51.11 U52.11 U53.11 | length 8146
  Top Layer w8: U41.11@3718.39,5315.26 3718.39,5332.35 3736.04,5350 v1(3740.15,5350) ; U42.11@4639.53,5315.26 4639.53,5332.35 4657.18,5350 v1(4660.15,5350) ; U44.11@5263.35,5315.81 5263.35,5332.9 5280.45,5350 v1(5290.15,5350) ; U48.11@6369.21,5316.2 6369.21,5333.29 6390.92,5355 v1(6395.15,5355) ; U49.11@7356.64,5315.54 7356.64,5332.63 7375.15,5351.13 v1(7375.15,5355) ; U50.11@7993.78,5314.87 7993.78,5331.96 8016.82,5355 v1(8020.15,5355) ; U51.11@9130.63,5314.55 9130.63,5331.64 9153.99,5355 v1(9155.15,5355) ; U52.11@10074.53,5314.55 10074.53,5331.64 10095.15,5352.26 v1(10095.15,5355) ; U53.11@10719.53,5316.36 10719.53,5333.45 10736.08,5350 v1(10740.15,5350)
  Bottom Layer w8: v1(3740.15,5350) v1(4660.15,5350) v1(5290.15,5350) 5295.15,5355 v1(6395.15,5355) v1(7375.15,5355) v1(8020.15,5355) v1(9155.15,5355) v1(10095.15,5355) 10735.15,5355 v1(10740.15,5350) 11075.15,5350 U2.3@11335.15,5090
CS: U2.2 U41.12 U42.12 U44.12 U48.12 U49.12 U50.12 U51.12 U52.12 U53.12 | length 8257
  Top Layer w8: U41.12@3698.7,5320.26 3698.7,5369.33 3709.84,5380.47 5245,5380.47 ; U42.12@4619.84,5315.26 4619.84,5375.47 4620,5375.63 ; U44.12@5243.65,5320.81 5245,5322.15 5245,5380.47 ; U48.12@6349.52,5321.2 6349.52,5380.16 6349.84,5380.47 ; U49.12@7336.95,5320.54 7336.95,5380.63 ; U50.12@7974.09,5319.87 7974.09,5380.63 ; U51.12@9110.94,5314.55 9110.94,5379.69 9110,5380.63 ; U52.12@10054.84,5319.55 10054.84,5380.63 ; U53.12@10699.84,5316.36 10700,5316.52 10700,5380.63 ; U2.2@11330.15,5190 11139.52,5380.63 10700,5380.63 ; 5245,5380.47 6349.84,5380.47 ; 6349.84,5380.47 6350,5380.63 7336.95,5380.63 ; 7336.95,5380.63 7974.09,5380.63 ; 7974.09,5380.63 9110,5380.63 ; 9110,5380.63 10054.84,5380.63 ; 10054.84,5380.63 10700,5380.63
D0: U50.5 U56.1 | length 104.2
  Top Layer w10: U50.5@7974.09,5223.73 7974.09,5120.39 U56.1@7974.69,5119.8
D1: U49.4 U55.2 | length 100
  Top Layer w10: U55.2@7317.26,5124.37 U49.4@7317.27,5224.4
D2: U49.5 U55.1 | length 100
  Top Layer w10: U55.1@7336.95,5124.37 U49.5@7336.95,5224.4
D3: U49.6 U55.20 | length 147.5
  Top Layer w10: U49.6@7356.64,5224.4 7356.64,5133.51 7375.15,5115 7375.15,5086.18 U55.20@7376.32,5085
D4: U49.7 U55.19 | length 205.7
  Top Layer w10: U55.19@7376.32,5065.31 7376.64,5065 7400.15,5065 7415.15,5080 7415.15,5185.57 U49.7@7376.32,5224.4
D5: U50.15 U56.6 | length 636.3
  Top Layer w10: U56.6@7856.58,5080 7670.63,5080 7650,5100.63 7650,5215.63 7749.24,5314.87 U50.15@7915.04,5314.87
D6: U50.1 U56.5 | length 157.1
  Top Layer w10: U56.5@7895.95,5119.8 7890.84,5119.8 7880,5130.63 7880,5240.47 U50.1@7898.99,5259.46
D7: U50.2 U56.4 | length 104.2
  Top Layer w10: U50.2@7915.04,5223.73 7915.04,5120.38 U56.4@7915.63,5119.8
D8: U50.3 U56.3 | length 104.2
  Top Layer w10: U50.3@7934.72,5223.73 7934.72,5120.39 U56.3@7935.32,5119.8
D9: U50.4 U56.2 | length 104.2
  Top Layer w10: U50.4@7954.41,5223.73 7954.41,5120.38 U56.2@7955,5119.8
D_HV: R56.1 U62.HV | length 579.4
  Top Layer w10: R56.1@7740.41,3678.19 7853.34,3678.19 8092.5,3917.35 U62.HV@8092.5,4045.63
DDOT: U49.3 U55.3 | length 100
  Top Layer w10: U55.3@7297.58,5124.37 U49.3@7297.58,5224.4
E0: U52.2 U58.4 | length 98
  Top Layer w10: U52.2@9995.79,5223.41 9995.79,5128.01 U58.4@9997.63,5126.16
E1: U51.1 U57.5 | length 157
  Top Layer w10: U57.5@9031.54,5114.37 9030,5114.37 9020,5124.37 9020,5243.3 U51.1@9035.84,5259.14
E2: U51.2 U57.4 | length 109.3
  Top Layer w10: U57.4@9051.22,5114.37 9051.89,5115.05 U51.2@9051.89,5223.41
E3: U51.3 U57.3 | length 109.3
  Top Layer w10: U57.3@9070.91,5114.37 9071.57,5115.04 U51.3@9071.57,5223.41
E4: U51.4 U57.2 | length 109.3
  Top Layer w10: U57.2@9090.59,5114.37 9091.26,5115.05 U51.4@9091.26,5223.41
E5: U51.5 U57.1 | length 109.3
  Top Layer w10: U57.1@9110.28,5114.37 9110.94,5115.04 U51.5@9110.94,5223.41
E6: U51.6 U57.20 | length 156.6
  Top Layer w10: U51.6@9130.63,5223.41 9130.63,5125 9150,5105.63 9150,5075.35 U57.20@9149.65,5075
E7: U51.7 U57.19 | length 218.8
  Top Layer w10: U57.19@9149.65,5055.31 9179.68,5055.31 9190,5065.63 9190,5183.72 U51.7@9150.31,5223.41
E8: U52.15 U58.6 | length 595.3
  Top Layer w10: U58.6@9938.58,5086.79 9937.42,5085.63 9780,5085.63 9745,5120.63 9745,5215.63 9843.92,5314.55 U52.15@9995.79,5314.55
E9: U52.1 U58.5 | length 146.2
  Top Layer w10: U58.5@9977.95,5126.16 9975,5126.16 9965,5136.16 9965,5244.4 U52.1@9979.74,5259.14
E_HV: R57.1 U63.HV | length 435.2
  Top Layer w10: R57.1@9450.41,3723.19 9722.5,3995.28 U63.HV@9722.5,4045.63
EDOT: U51.15 U57.6 | length 614.8
  Top Layer w10: U57.6@8992.17,5075 8991.54,5075.63 8825,5075.63 8795,5105.63 8795,5210.63 8898.92,5314.55 U51.15@9051.89,5314.55
F0: U53.5 U59.1 | length 105.6
  Top Layer w10: U59.1@10699.18,5119.87 10699.84,5120.53 U53.5@10699.84,5225.22
F1: U52.4 U58.2 | length 98
  Top Layer w10: U52.4@10035.16,5223.41 10035.16,5128.01 U58.2@10037,5126.16
F2: U52.5 U58.1 | length 98
  Top Layer w10: U52.5@10054.84,5223.41 10056.69,5221.56 U58.1@10056.69,5126.16
F3: U52.6 U58.20 | length 145.5
  Top Layer w10: U52.6@10074.53,5223.41 10074.53,5141.1 10095,5120.63 10095,5087.86 U58.20@10096.06,5086.79
F4: U52.7 U58.19 | length 204.2
  Top Layer w10: U52.7@10094.21,5223.41 10135,5182.62 10135,5080.63 10121.47,5067.1 U58.19@10096.06,5067.1
F5: U53.15 U59.6 | length 612.3
  Top Layer w10: U59.6@10581.07,5080.5 10580.93,5080.63 10410,5080.63 10380,5110.63 10380,5200.63 10495.73,5316.36 U53.15@10640.79,5316.36
F6: U53.1 U59.5 | length 151.8
  Top Layer w10: U59.5@10620.44,5119.87 10620,5119.87 10610,5129.87 10610,5246.21 U53.1@10624.74,5260.95
F7: U53.2 U59.4 | length 105.6
  Top Layer w10: U59.4@10640.12,5119.87 10640.79,5120.54 U53.2@10640.79,5225.22
F8: U53.3 U59.3 | length 105.6
  Top Layer w10: U59.3@10659.81,5119.87 10660.47,5120.53 U53.3@10660.47,5225.22
F9: U53.4 U59.2 | length 105.6
  Top Layer w10: U59.2@10679.49,5119.87 10680.16,5120.54 U53.4@10680.16,5225.22
F_HV: R58.1 U64.HV | length 755.4
  Top Layer w10: R58.1@10335.41,3733.19 10732.99,3733.19 10842.5,3842.7 U64.HV@10842.5,4045.63
FDOT: U52.3 U58.3 | length 98
  Top Layer w10: U52.3@10015.47,5223.41 10015.47,5128.02 U58.3@10017.32,5126.16
G0: U44.6 U46.20 | length 150.7
  Top Layer w10: U44.6@5263.35,5224.67 5263.35,5137.29 5285,5115.63 5285,5086.7 U46.20@5282.36,5084.06
G1: U44.7 U46.19 | length 222
  Top Layer w10: U46.19@5282.36,5064.37 5313.73,5064.37 5335,5085.63 5335,5172.69 U44.7@5283.02,5224.67
G_HV1: R59.1 U18.1 | length 654.8
  Top Layer w10: R59.1@5820.41,3643.19 5820.41,3644.32 6091.73,3915.65 U18.1@6091.73,4185.63
G_HV2: R60.1 U19.1 | length 913.3
  Top Layer w10: R60.1@5819.81,3735 5819.81,3736.13 6020.15,3936.47 6020.15,4464.05 U19.1@6091.73,4535.63